# Altium PCB 对射式红外传感器.PcbDoc
Units mm, origin at the board's own origin, x right, y up, seen from the top; angles counter-clockwise.
Board outline 152.4 x 101.6 mm, 2 copper layers (Top Layer, Bottom Layer); 5 components, 5 nets, 15 pads, 1 vias.
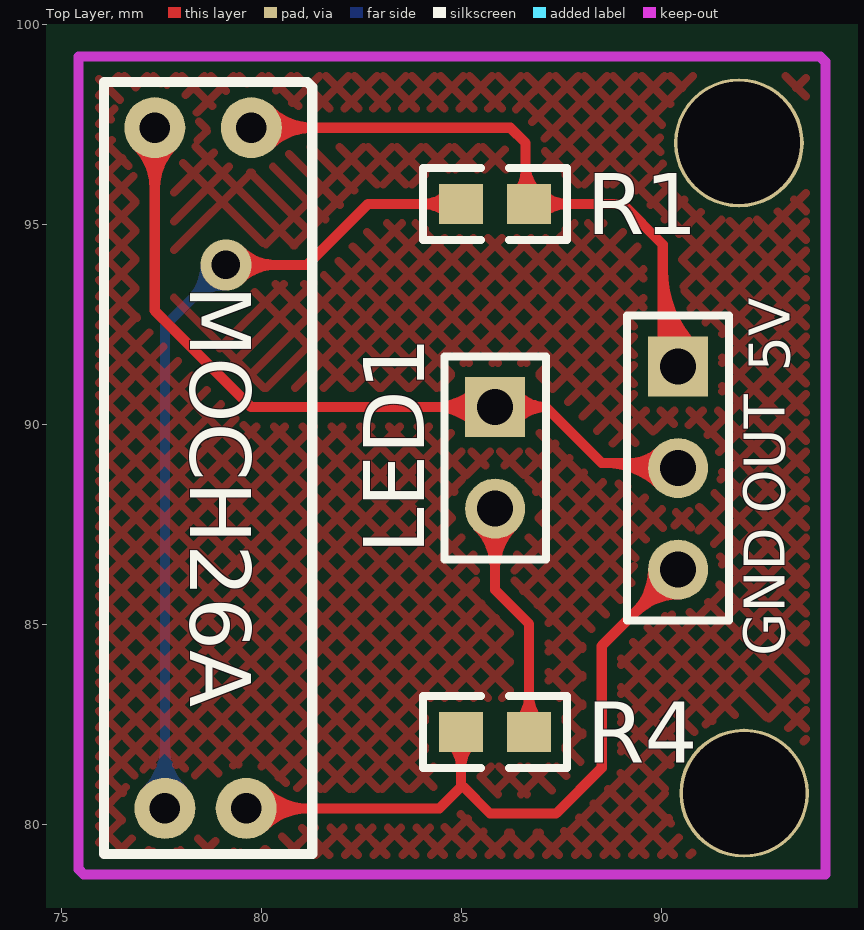
[diagram p0: Top Layer view]
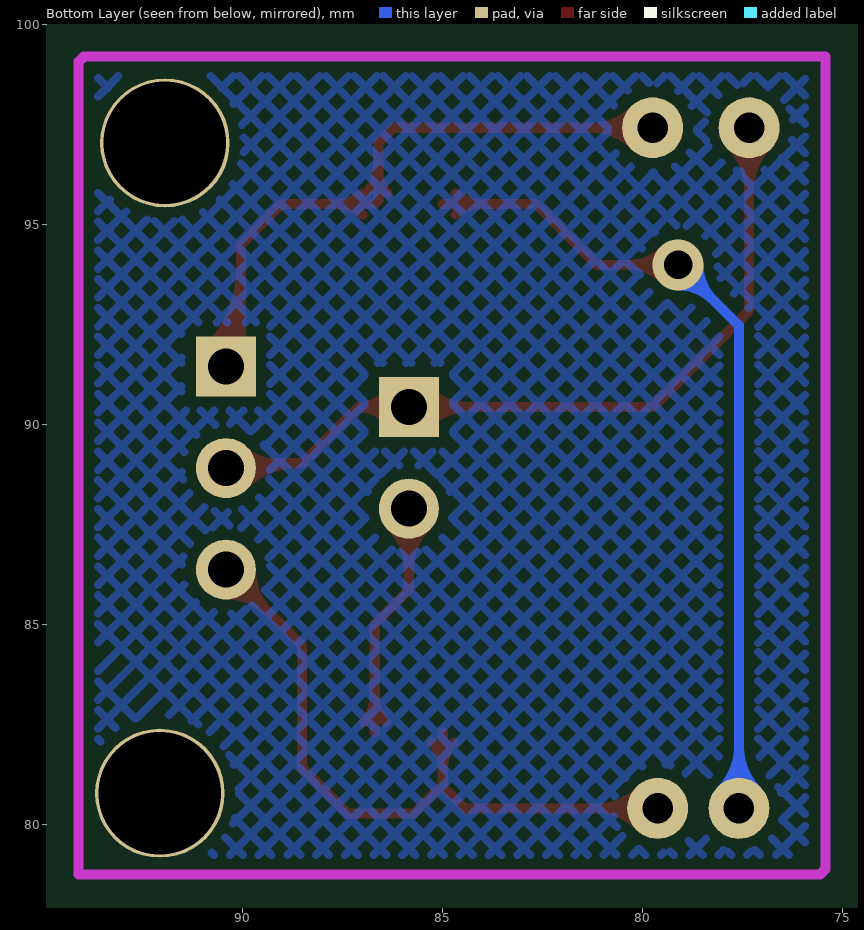
[diagram p1: Bottom Layer view, seen from below]

## Layer stack, top to bottom
Top Layer: signal copper 0.0356
Dielectric: dielectric 0.32, FR-4, Dk 4.8
Bottom Layer: signal copper 0.0356

## Board outline
25.4,25.4 177.8,25.4 177.8,127 25.4,127

## Design rules (kind name [scope] priority, off if disabled: settings)
Clearance [All] p1: gap=0.254
ComponentClearance [All] p1: gap=0.254 collisioncheckmode=3 verticalgap=0.254
PolygonConnect [All] p1: connectstyle=Relief reliefconductorwidth=0.254 reliefentries=4 polygonreliefangle="90 Angle"
RoutingVias [All] p1: holewidth=0.711 width=1.27 viastyle="Through Hole" minholewidth=0.711 minwidth=1.27 maxholewidth=0.711 maxwidth=1.27
SolderMaskExpansion [All] p1: expansion=0.102
TestPointUsage [All] p1: valid=0 allowmultiple=FALSE
Testpoint [All] p1: side=15 testpointundercomponent=TRUE minsize=1.016 maxsize=2.54 preferedsize=1.524 minholesize=0 maxholesize=1.016 preferedholesize=0.813 testpointgrid=0.025 style=1023 order=0123456789
Width [All] p1: maxlimit=0.254 minlimit=0.254 preferedwidth=0.254
17 further rules are at their usual default settings.

## Components (designator, comment, footprint, x,y, rotation, side; value= is the part's Value field where it differs from the comment)
JP1 "Header 3" HDR1X3 90.424,91.44 r270 top
LED1 "" HDR1X2 85.852,90.424 r270 top
MOCH26A "传感器" MOCH26A 77.724,81.28 r180 top
R1 "" C1608-0603 85.852,95.504 r0 top
R4 "" C1608-0603 85.852,82.296 r180 top

## Footprints (in the part's own frame and the unit in brackets; to place one, negate y for a bottom-side part, rotate by r counter-clockwise, add the part's x,y. Pads: shape width x height; smd on the part's side, far side on the other; paste and mask are expansions set on the pad)
C1608-0603 [mm] "Chip Resistor; Body 1.6 x 0.8 mm (LxW typ)"
  rect 1.1x1 smd: 1(-0.85,0) 2(0.85,0)
  silkscreen extent -1.8,-0.9 1.8,0.9
HDR1X2 [mm]
  rect 1.5x1.5 hole 0.9: 1(0,0)
  round 1.5 hole 0.9: 2(2.54,0)
  silkscreen extent -1.27,-1.27 3.81,1.27
HDR1X3 [mm] "Connector; Header; 3 Position"
  rect 1.5x1.5 hole 0.9: 1(0,0)
  round 1.5 hole 0.9: 2(2.54,0) 3(5.08,0)
  silkscreen extent -1.27,-1.27 6.35,1.27
MOCH26A [mil]
  round 60 hole 30: 1(5,35) 2(-75,35) 3(-80,-635) 4(15,-635)
  silkscreen extent -140,-680 65,80

## Part data
JP1: "Header, 3-Pin"
LED1: library part LED3, "Typical BLUE SiC LED"
R1 R4: library part Res2, "Resistor"

## Free pads (board coordinates)
  oval 3.24x3.224 hole 3.062: 4(91.948,97.028) 4(92.075,80.772)

## Via types
v1: diameter 1.27, hole 0.711, Top Layer to Bottom Layer, 1 vias

## Nets (pads, with @x,y where several pads share a name; then routed paths per layer and width w, separated by ;. In a path a pad name is that pad's centre, name@x,y a point inside that pad or via, vN(x,y) a via of type N, cw(c..) or ccw(c..) an arc to the next point about the centre after c; other vN are vias at no path point)
GND: JP1.3 MOCH26A.2 R4.2 | length 26
  Top Layer w0.254: MOCH26A.2 84.455,80.391 85.002,80.938 ; MOCH26A.2@79.898,80.122 cw(c80.549,79.471) 80.549,80.391 cw(c80.549,81.311) MOCH26A.2@79.898,80.66 ; MOCH26A.2@80.078,79.942 cw(c81.162,78.858) 81.162,80.391 cw(c81.162,81.924) MOCH26A.2@80.078,80.84 ; R4.2@84.738,82.032 cw(c84.102,81.396) 85.002,81.396 cw(c85.902,81.396) R4.2@85.266,82.032 ; R4.2 85.002,80.938 ; JP1.3@89.801,86.36 cw(c88.297,86.36) 89.36,85.296 cw(c90.424,84.233) JP1.3@90.424,85.737 ; JP1.3@90.055,86.36 cw(c89.164,86.36) 89.794,85.73 cw(c90.424,85.1) JP1.3@90.424,85.991 ; JP1.3 88.519,84.455 88.519,81.407 87.376,80.264 85.725,80.264 85.051,80.938 85.002,80.938
NetJP1_2: JP1.2 LED1.1 MOCH26A.4 | length 33
  Top Layer w0.254: MOCH26A.4@76.894,96.96 cw(c75.81,95.876) 77.343,95.876 cw(c78.876,95.876) MOCH26A.4@77.792,96.96 ; MOCH26A.4@77.074,97.14 cw(c76.423,96.489) 77.343,96.489 cw(c78.263,96.489) MOCH26A.4@77.612,97.14 ; MOCH26A.4 77.343,92.837 79.756,90.424 87.122,90.424 ; LED1.1@85.411,89.983 ccw(c84.348,88.92) 84.348,90.424 ccw(c84.348,91.928) LED1.1@85.411,90.865 ; LED1.1@85.591,90.163 ccw(c84.961,89.533) 84.961,90.424 ccw(c84.961,91.315) LED1.1@85.591,90.685 ; LED1.1@86.144,90.198 cw(c86.604,89.842) 86.604,90.424 cw(c86.604,91.006) LED1.1@86.144,90.65 ; LED1.1@86.345,90.043 cw(c87.122,89.441) 87.122,90.424 ; LED1.1@86.345,90.805 ccw(c87.122,91.407) 87.122,90.424 ; 88.613,89.027 cw(c88.613,87.089) JP1.2@89.983,88.459 ; JP1.2@89.983,89.341 cw(c89.227,90.097) 89.227,89.027 cw(c89.227,87.703) JP1.2@90.163,88.639 ; JP1.2@90.297,89.027 88.519,89.027 87.122,90.424
NetLED1_2: LED1.2 R4.1 | length 11.1
  Top Layer w0.254: LED1.2@85.411,87.443 cw(c84.348,86.38) 85.852,86.38 cw(c87.356,86.38) LED1.2@86.293,87.443 ; LED1.2@85.591,87.623 cw(c84.961,86.993) 85.852,86.993 cw(c86.743,86.993) LED1.2@86.113,87.623 ; LED1.2 85.852,85.852 86.702,85.002 R4.1 ; R4.1@86.438,82.56 ccw(c85.801,83.196) 86.702,83.196 ccw(c87.602,83.196) R4.1@86.966,82.56
NetMOCH26A_1: MOCH26A.1 R1.1 | length 29.9
  Top Layer w0.254: v1(79.121,93.98) 81.153,93.98 82.677,95.504 R1.1 ; v1@79.48,93.621 cw(c80.347,92.754) 80.347,93.98 cw(c80.347,95.206) v1@79.48,94.339 ; R1.1@84.688,95.24 ccw(c84.052,94.604) 84.052,95.504 ccw(c84.052,96.404) R1.1@84.688,95.768
  Bottom Layer w0.254: MOCH26A.1@77.148,80.84 ccw(c76.064,81.924) 77.597,81.924 ccw(c79.13,81.924) MOCH26A.1@78.046,80.84 ; MOCH26A.1@77.328,80.66 ccw(c76.677,81.311) 77.597,81.311 ccw(c78.517,81.311) MOCH26A.1@77.866,80.66 ; MOCH26A.1 77.597,92.456 v1(79.121,93.98) ; v1@78.613,93.98 cw(c77.387,93.98) 78.254,93.113 cw(c79.121,92.246) v1@79.121,93.472
VCC: JP1.1 MOCH26A.3 R1.2 | length 27.4
  Top Layer w0.254: MOCH26A.3 86.233,97.409 86.614,97.028 86.614,95.592 R1.2 89.027,95.504 90.043,94.488 90.043,91.821 JP1.1 ; MOCH26A.3@80.025,97.14 cw(c80.676,96.489) 80.676,97.409 cw(c80.676,98.329) MOCH26A.3@80.025,97.678 ; MOCH26A.3@80.205,96.96 cw(c81.289,95.876) 81.289,97.409 cw(c81.289,98.942) MOCH26A.3@80.205,97.858 ; R1.2@86.388,95.768 ccw(c85.843,96.313) 86.614,96.313 ; 86.614,96.496 ccw(c87.644,96.496) R1.2@86.916,95.768 ; R1.2@87.016,95.24 cw(c87.652,94.604) 87.652,95.504 cw(c87.652,96.404) R1.2@87.016,95.768 ; 90.043,92.637 ccw(c91.621,92.637) JP1.1@90.505,91.521 ; 90.043,93.251 ccw(c92.235,93.251) JP1.1@90.685,91.701 ; 90.043,93.864 ccw(c92.848,93.864) JP1.1@90.865,91.881

## Polygon pours and split planes (outlines as drawn)
no net on Top Layer (hatched 45Degree grid 0.508 track 0.203): 75.946,98.821 93.853,98.821 93.853,79.136 75.946,79.136
no net on Bottom Layer (hatched 45Degree grid 0.508 track 0.203): 75.819,98.806 93.726,98.806 93.726,79.121 75.946,79.121 75.946,98.806

## Keep-outs
Keep-Out Layer:
  lines w0.254: 75.438,78.867 75.438,99.187 93.98,99.187 94.107,99.06 94.107,78.74 75.565,78.74 75.438,78.867

## Silkscreen, mask and mechanical layers (free items; w line width, h text height)
Top Overlay:
  text "5V" at 93.218,91.313 h1.02 r90
  text "OUT" at 93.091,87.757 h1.02 r90
  text "GND" at 93.091,84.201 h1.02 r90